# Altium PCB ADC0809电压采集.PcbDoc
Units mm, origin at the board's own origin, x right, y up, seen from the top; angles counter-clockwise.
Board outline 74.8 x 81.66 mm, 2 copper layers (Top Layer, Bottom Layer); 17 components, 35 nets, 125 pads, 0 vias.
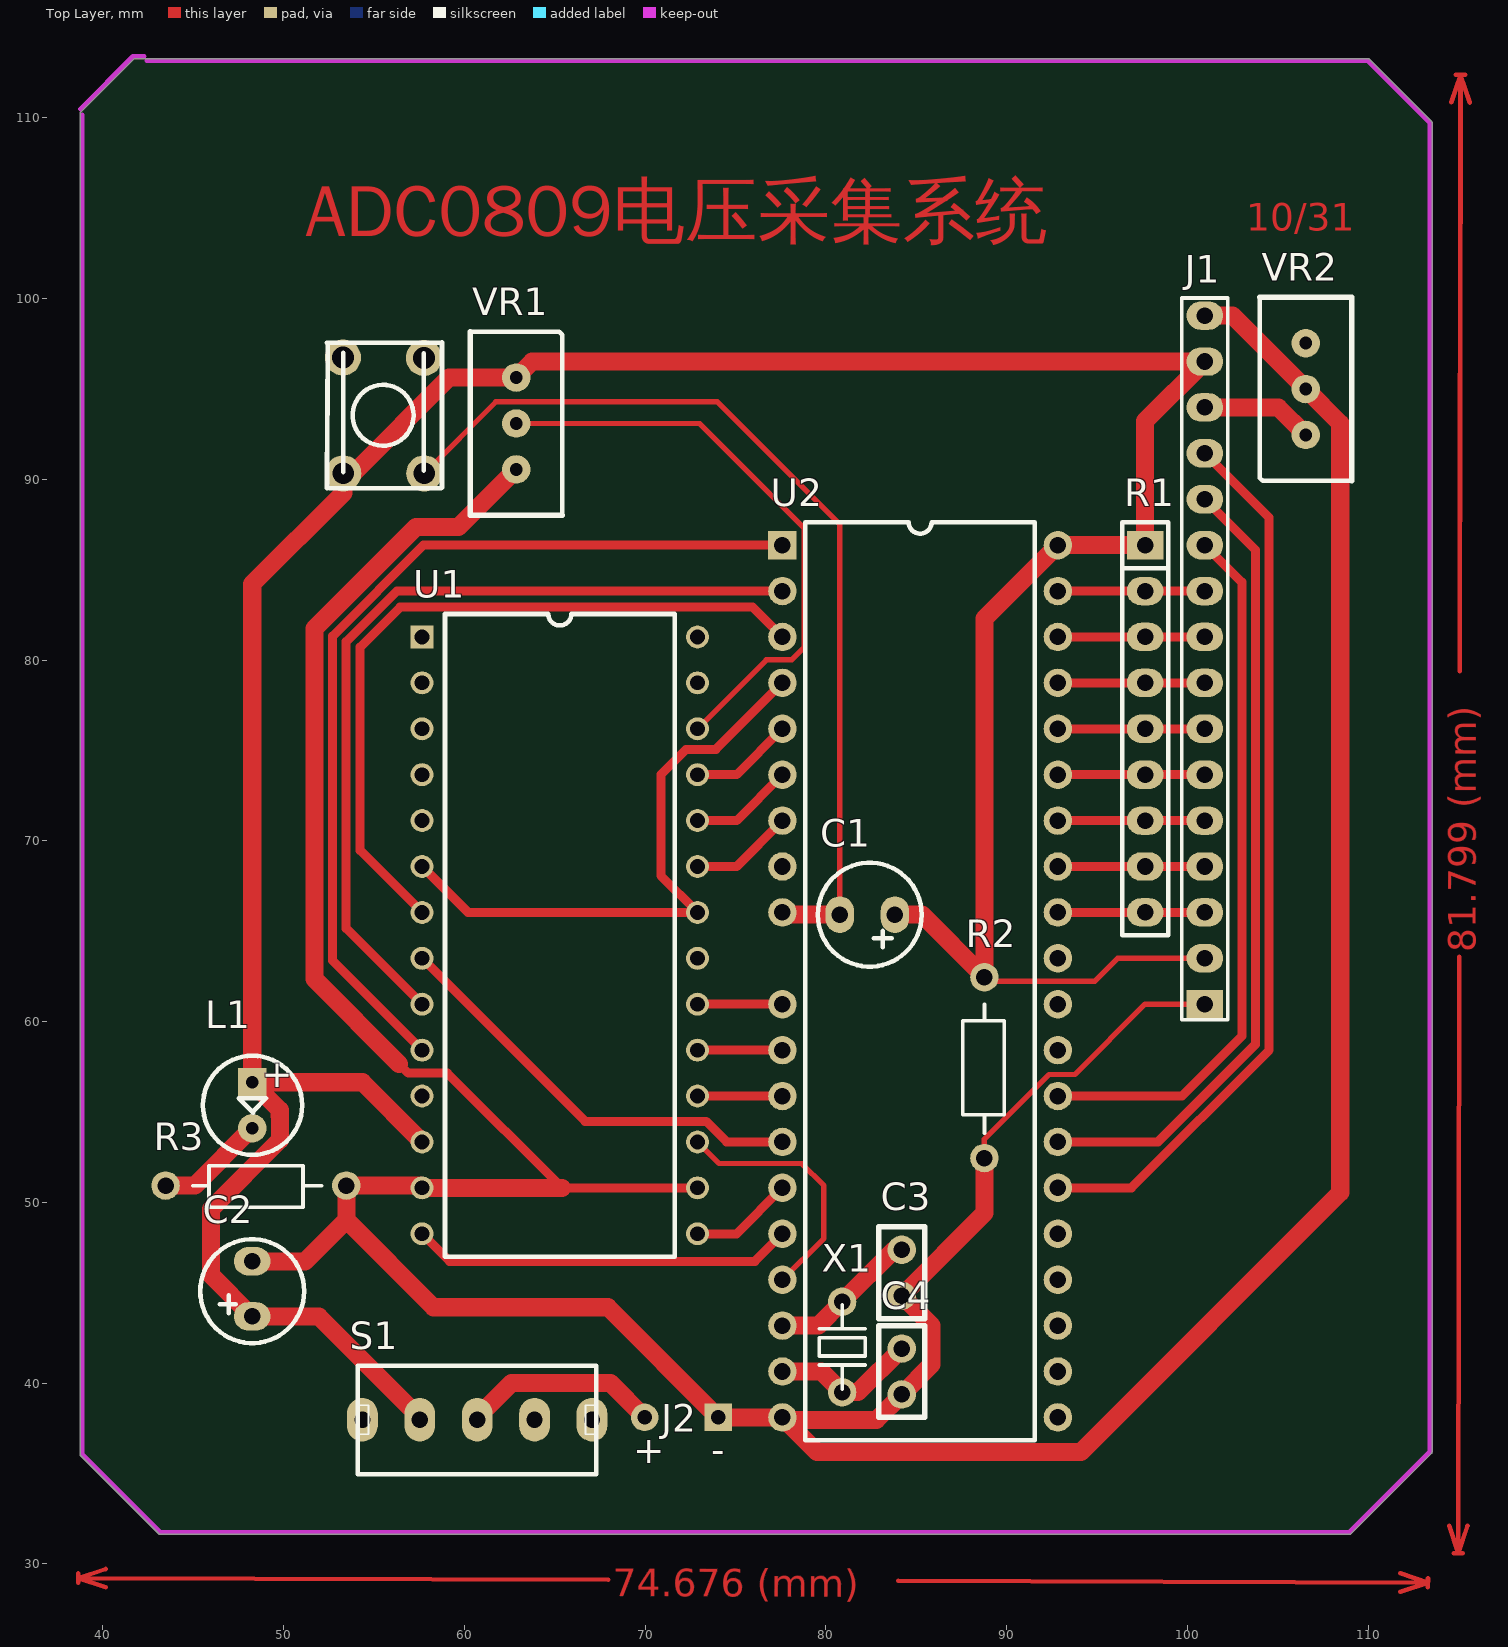
[diagram p0: Top Layer view]
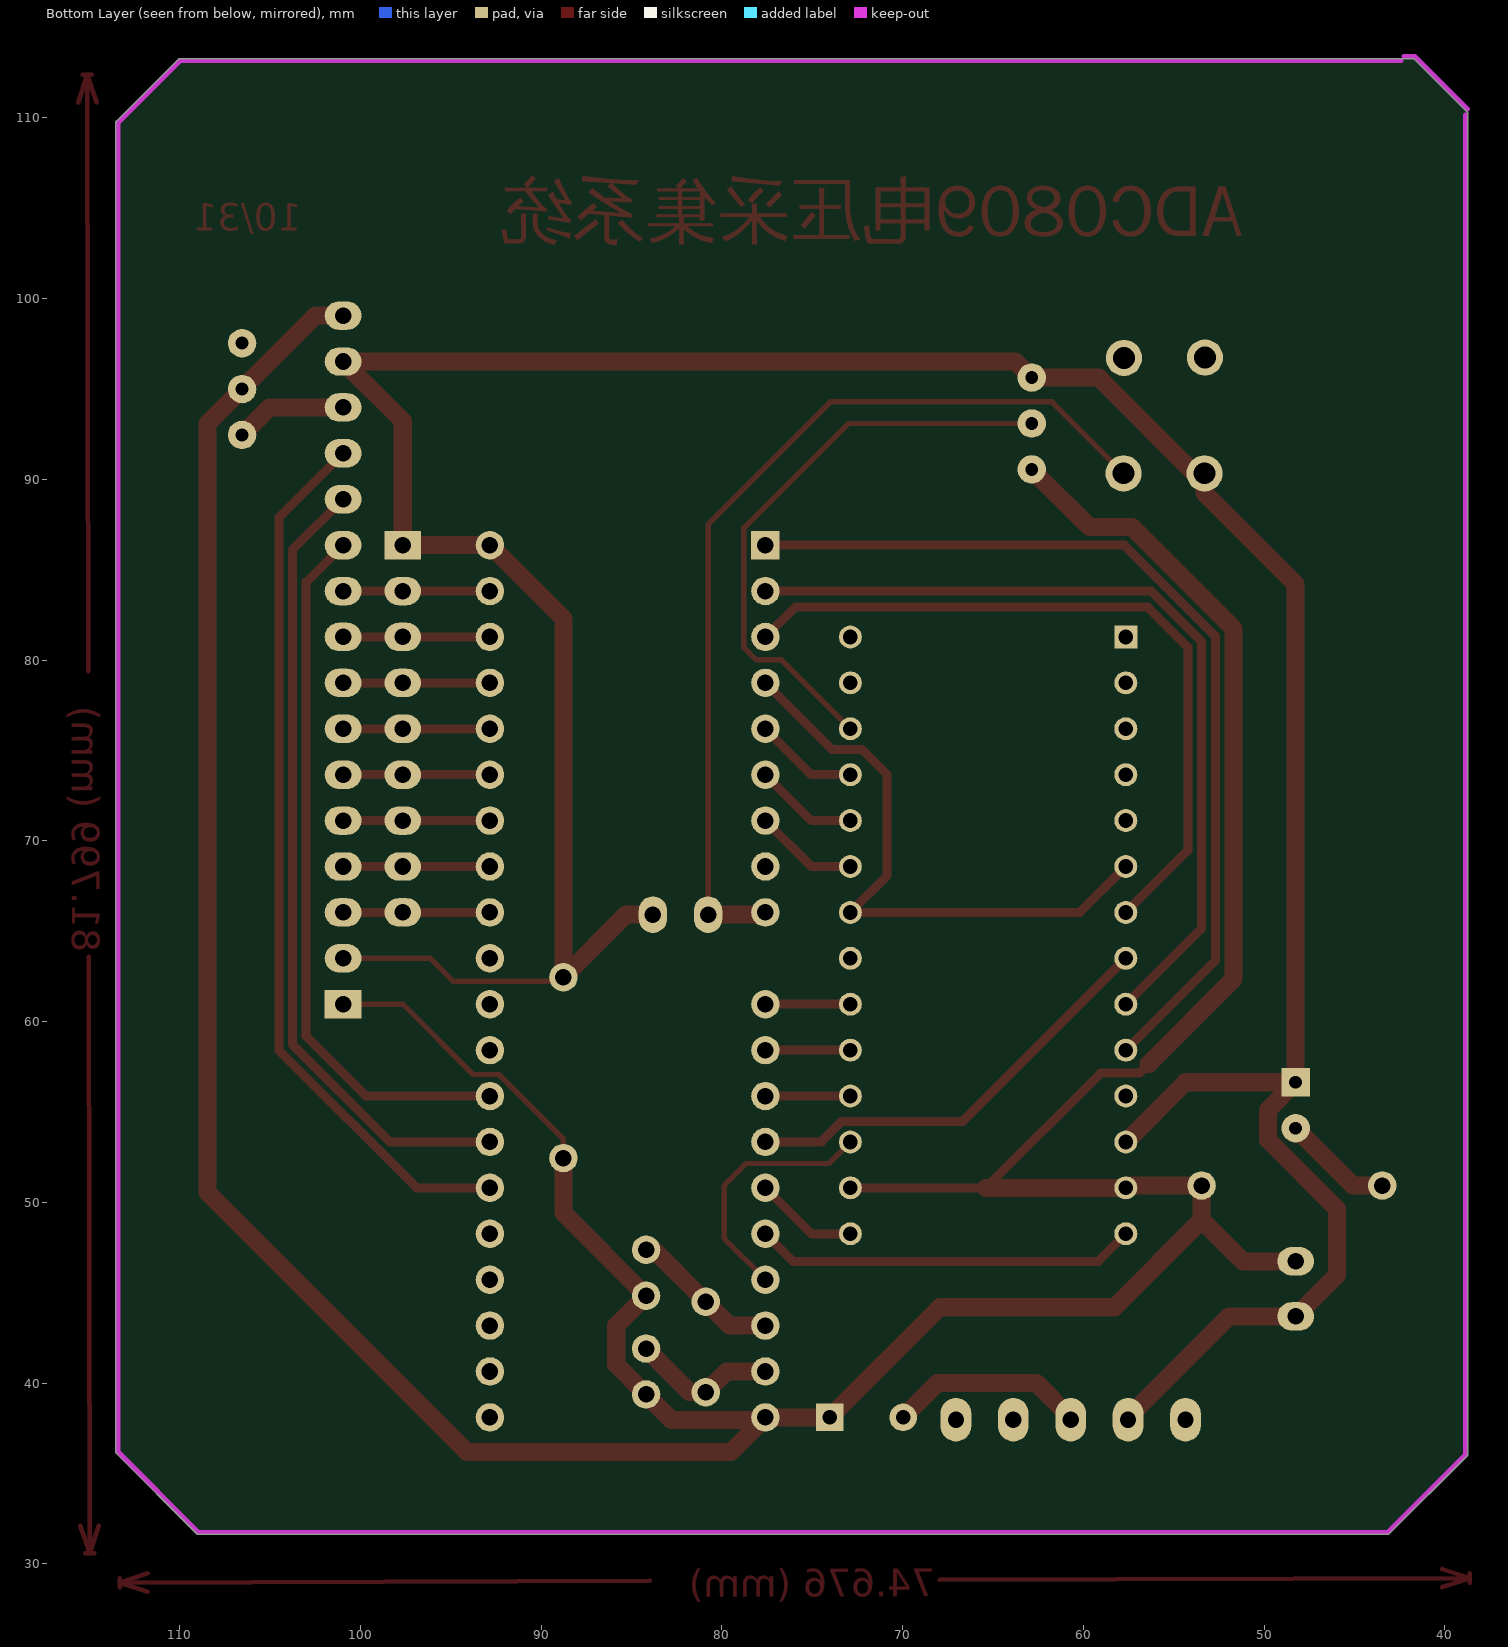
[diagram p1: Bottom Layer view, seen from below]

## Layer stack, top to bottom
Top Solder: solder mask 0.0102, Solder Resist, Dk 3.5
Top Layer: signal copper 0.0356
Dielectric 1: dielectric 0.32, FR-4, Dk 4.8
Bottom Layer: signal copper 0.0356
Bottom Solder: solder mask 0.0102, Solder Resist, Dk 3.5

## Board outline
38.735,36.068 38.735,110.183 cw(c38.862,110.183) 38.737,110.21 cw(c38.862,110.236) 38.772,110.326 41.693,113.247 41.692,113.247 cw(c41.783,113.157) 41.783,113.284 109.982,113.284 cw(c109.982,113.157) 110.073,113.247 110.072,113.247 113.501,109.818 113.501,109.819 cw(c113.411,109.728) 113.538,109.728 113.538,36.195 cw(c113.411,36.195) 113.501,36.104 113.501,36.105 109.056,31.66 109.057,31.66 cw(c108.966,31.75) 108.966,31.623 43.18,31.623 cw(c43.18,31.75) 43.089,31.66 43.09,31.66 38.772,35.978 38.772,35.977 cw(c38.862,36.068)

## Design rules (kind name [scope] priority, off if disabled: settings)
Clearance [All] p1: gap=0.254
PolygonConnect [All] p1: connectstyle=Relief reliefconductorwidth=0.254 reliefentries=4 polygonreliefangle="90 Angle" airgapwidth=0.254
RoutingVias [All] p1: holewidth=0.711 width=1.27 viastyle="Through Hole" minholewidth=0.711 minwidth=1.27 maxholewidth=0.711 maxwidth=1.27
SolderMaskExpansion [All] p1: expansion=0.102
Width [All] p1: maxlimit=2 minlimit=0.254 preferedwidth=1 bottomlayer_maxwidth=0.254 bottomlayer_prefwidth=0.254 minimp=50.000000 maximp=50.000000 favimp=50.000000
30 further rules are at their usual default settings.

## Classes and differential pairs
component class ADC0809电压采集: C1 C2 C3 C4 J1 J2 L1 R1 R2 R3 S1 VR1 VR2 X1

## Components (designator, comment, footprint, x,y, rotation, side; value= is the part's Value field where it differs from the comment)
C1 "10uf" ELEC2 83.82,65.913 r180 top
C2 "100uf" ELEC2 48.26,43.688 r90 top
C3 "30pf" RAD0.1 84.201,47.371 r270 top
C4 "30pf" RAD0.1 84.201,39.37 r90 top
J1 "CON16" SIP16 100.965,60.96 r90 top
J2 "CON2" SIP2 57.912,24.384 r180 top
L1 "B_LED" LED 48.26,56.642 r270 top
R1 "4.7k" SIP9 97.663,86.36 r270 top
R2 "10K" RES 88.773,52.451 r90 top
R3 "1K" RES 53.467,50.927 r180 top
S1 "单刀开关" SW 60.706,37.973 r180 top
U1 "ADC0809" DIP28 57.658,81.28 r0 top
U2 "89C52" DIP40 77.597,86.36 r0 top
VR1 "10K" VR 62.865,90.551 r90 top
VR2 "10K" VR 106.553,97.536 r270 top
X1 "12M" XTAL 80.899,39.497 r90 top
? "SW2" SW2 56.261,93.599 r90 top

## Footprints (in the part's own frame and the unit in brackets; to place one, negate y for a bottom-side part, rotate by r counter-clockwise, add the part's x,y. Pads: shape width x height; smd on the part's side, far side on the other; paste and mask are expansions set on the pad)
DIP28 [mil]
  rect 50x50 hole 32: 1(0,0)
  round 50 hole 32: 2(0,-100) 3(0,-200) 4(0,-300) 5(0,-400) 6(0,-500) 7(0,-600) 8(0,-700) 9(0,-800) 10(0,-900) 11(0,-1000) 12(0,-1100) 13(0,-1200) 14(0,-1300) 15(600,-1300) 16(600,-1200) 17(600,-1100) 18(600,-1000) 19(600,-900) 20(600,-800) 21(600,-700) 22(600,-600) 23(600,-500) 24(600,-400) 25(600,-300) 26(600,-200) 27(600,-100) 28(600,0)
  silkscreen extent 50,-1350 550,50
DIP40 [mil]
  rect 62x62 hole 36: 1(0,0)
  round 62 hole 36: 2(0,-100) 3(0,-200) 4(0,-300) 5(0,-400) 6(0,-500) 7(0,-600) 8(0,-700) 9(0,-800) 11(0,-1000) 12(0,-1100) 13(0,-1200) 14(0,-1300) 15(0,-1400) 16(0,-1500) 17(0,-1600) 18(0,-1700) 19(0,-1800) 20(0,-1900) 21(600,-1900) 22(600,-1800) 23(600,-1700) 24(600,-1600) 25(600,-1500) 26(600,-1400) 27(600,-1300) 28(600,-1200) 29(600,-1100) 30(600,-1000) 31(600,-900) 32(600,-800) 33(600,-700) 34(600,-600) 35(600,-500) 36(600,-400) 37(600,-300) 38(600,-200) 39(600,-100) 40(600,0)
  silkscreen extent 50,-1950 550,50
ELEC2 [mil]
  oval 62x80 hole 36: 1(0,0) 2(120,0)
  silkscreen extent -58,-113 168,113
LED [mil]
  rect 62x62 hole 28: A(0,0)
  round 62 hole 28: K(100,0)
  silkscreen extent -58,-107 158,109
RAD0.1 [mil]
  round 62 hole 36: 1(0,0) 2(100,0)
  silkscreen extent -50,-50 150,50
RES [mil]
  round 62 hole 36: 1(0,0) 2(393.7,0)
  silkscreen extent 54,-43 335,47
SIP2 [mil]
  rect 60x60 hole 32: 1(-635,-540)
  round 60 hole 32: 2(-475,-540)
SIP9 [mil]
  rect 62x80 hole 36: 1(0,0)
  oval 62x80 hole 36: 2(100,0) 3(200,0) 4(300,0) 5(400,0) 6(500,0) 7(600,0) 8(700,0) 9(800,0)
  silkscreen extent -50,-50 850,50
SIP16 [mil]
  rect 62x80 hole 36: 1(0,0)
  oval 62x80 hole 36: 2(100,0) 3(200,0) 4(300,0) 5(400,0) 6(500,0) 7(600,0) 8(700,0) 9(800,0) 10(900,0) 11(1000,0) 12(1100,0) 13(1200,0) 14(1300,0) 15(1400,0) 16(1500,0)
  silkscreen extent -34,-50 1538,50
SW [mm]
  oval 1.7x2.4 hole 0.9: 1(0,0) 2(3.175,0) 3(-3.175,0) 4(-6.35,0) 5(6.35,0)
  silkscreen extent -6.6,-2.99 6.6,3.01
SW2 [mm]
  round 2 hole 1.2: 1(-3.27,2.96) 2(3.14,2.98) 3(3.12,-1.5) 4(-3.27,-1.52)
  silkscreen extent -4.09,-2.5 3.98,3.88
VR [mil]
  round 62 hole 28: 1(0,0) 2(200,0) 3(100,0)
  silkscreen extent -100,-100 300,100
XTAL [mil]
  round 62 hole 36: 1(0,0) 2(196.85,0)
  silkscreen extent 6,-50 191,50

## Part data
C1 C2: library part ELECTRO1, "Electrolytic Capacitor"
C3 C4: library part CAP
J1: "SOCKET"
J2: "Connector"
R1: library part RES*8
R2 R3: library part RES
VR1 VR2: library part POT1
X1: library part CRYSTAL

## Nets (pads, with @x,y where several pads share a name; then routed paths per layer and width w, separated by ;. In a path a pad name is that pad's centre, name@x,y a point inside that pad or via, vN(x,y) a via of type N, cw(c..) or ccw(c..) an arc to the next point about the centre after c; other vN are vias at no path point)
GND: C2.2 C3.2 C4.1 J1.1 J1.16 J2.1 R2.1 R3.1 U1.13 U1.16 U2.20 VR1.1 VR2.3 | length 237.8
  Top Layer w0.3: R2.1 88.773,53.501 92.344,57.071 93.774,57.071 97.663,60.96 J1.1
  Top Layer w0.5: 56.388,57.658 56.896,57.15 59.055,57.15 65.405,50.8 U1.16
  Top Layer w1: C2.2@49.022,46.736 51.181,46.736 53.467,49.022 ; 56.388,57.658 51.701,62.345 51.701,81.746 57.319,87.364 59.678,87.364 VR1.1 ; U1.13@57.531,50.927 R3.1 53.467,49.022 ; U1.13 65.405,50.8 ; R2.1 88.773,49.403 C3.2 85.852,43.18 85.852,41.021 C4.1 82.787,37.956 U2.20@77.741,37.956 ; J1.16 102.489,99.06 VR2.3 108.458,93.091 108.458,50.546 94.107,36.195 79.502,36.195 U2.20@77.741,37.956 ; 53.467,49.022 58.293,44.196 67.945,44.196 J2.1 U2.20 U2.20@77.741,37.956
Net_4: ?.4 C1.2 U2.9 | length 52.3
  Top Layer w0.3: ?.4 61.734,94.282 73.993,94.282 80.772,87.503 C1.2
  Top Layer w1: U2.9 77.724,65.913 C1.2
NetC3_1: C3.1 U2.18 X1.2 | length 8.3
  Top Layer w1: U2.18 79.582,43.18 X1.2 83.773,47.371 C3.1
NetC4_2: C4.2 U2.19 X1.1 | length 8.1
  Top Layer w1: U2.19 79.756,40.64 X1.1 81.788,39.497 C4.2
NetJ1_3: J1.3 R1.9 U2.32 | length 8.1
  Top Layer w0.5: U2.32 R1.9 J1.3
NetJ1_4: J1.4 R1.8 U2.33 | length 8.1
  Top Layer w0.5: U2.33 R1.8 J1.4
NetJ1_5: J1.5 R1.7 U2.34 | length 8.1
  Top Layer w0.5: U2.34 R1.7 J1.5
NetJ1_6: J1.6 R1.6 U2.35 | length 8.1
  Top Layer w0.5: U2.35 R1.6 J1.6
NetJ1_7: J1.7 R1.5 U2.36 | length 8.8
  Top Layer w0.5: U2.36 R1.5 J1.7 J1.7@101.6,76.2
NetJ1_8: J1.8 R1.4 U2.37 | length 8.1
  Top Layer w0.5: U2.37 R1.4 J1.8
NetJ1_9: J1.9 R1.3 U2.38 | length 8.1
  Top Layer w0.5: U2.38 R1.3 J1.9
NetJ1_10: J1.10 R1.2 U2.39 | length 8.1
  Top Layer w0.5: U2.39 R1.2 J1.10
NetJ1_11: J1.11 U2.28 | length 39.6
  Top Layer w0.5: U2.28 99.695,55.88 103.013,59.198 103.013,84.312 J1.11
NetJ1_12: J1.12 U2.27 | length 44.5
  Top Layer w0.5: U2.27 98.375,53.34 103.767,58.732 103.767,86.098 J1.12
NetJ1_13: J1.13 U2.26 | length 49.3
  Top Layer w0.5: U2.26 96.901,50.8 104.521,58.42 104.521,87.884 J1.13
NetJ2_2: J2.2 S1.1 | length 11
  Top Layer w1: S1.1 60.706,38.1 62.611,40.005 68.072,40.005 J2.2
NetL1_K: L1.K R3.2 | length 6.1
  Top Layer w1: R3.2 45.085,50.927 L1.K
NetU1_6: U1.6 U1.22 U2.4 | length 33.6
  Top Layer w0.5: U1.6 60.198,66.04 U1.22 70.866,68.072 70.866,73.66 72.267,75.061 73.918,75.061 U2.4
NetU1_7: U1.7 U2.3 | length 41.1
  Top Layer w0.5: U1.7 54.229,69.469 54.229,80.722 56.438,82.931 75.946,82.931 U2.3
NetU1_9: U1.9 U2.2 | length 47.1
  Top Layer w0.5: U1.9 53.459,65.159 53.459,81.018 56.261,83.82 U2.2
NetU1_10: U1.10 U2.1 | length 51.9
  Top Layer w0.5: U1.10 52.705,63.373 52.705,81.33 57.735,86.36 U2.1
NetU1_23: U1.23 U2.7 | length 5.8
  Top Layer w0.5: U1.23 75.057,68.58 U2.7
NetU1_24: U1.24 U2.6 | length 5.8
  Top Layer w0.5: U1.24 75.057,71.12 U2.6
NetU1_25: U1.25 U2.5 | length 5.8
  Top Layer w0.5: U1.25 75.057,73.66 U2.5
NetU1_26: U1.26 VR1.3 | length 32.7
  Top Layer w0.3: VR1.3 73.012,93.091 78.788,87.315 78.788,80.693 78.105,80.01 76.708,80.01 U1.26
P3.0: U1.21
P3.1: U1.20 U2.11 | length 4.7
  Top Layer w0.5: U1.20 U2.11
P3.2: U1.19 U2.12 | length 4.7
  Top Layer w0.5: U1.19 U2.12
P3.3: U1.18 U2.13 | length 4.7
  Top Layer w0.5: U1.18 U2.13
P3.4: U1.8 U2.14 | length 24.1
  Top Layer w0.5: U1.8 66.679,54.479 73.37,54.479 74.509,53.34 U2.14
P3.5: U1.15 U2.15 | length 5.8
  Top Layer w0.5: U1.15 75.057,48.26 U2.15
P3.6: U1.14 U2.16 | length 21.2
  Top Layer w0.5: U1.14 59.182,46.736 76.073,46.736 U2.16
P3.7: U1.17 U2.17 | length 14.1
  Top Layer w0.3: U1.17 74.089,52.149 78.661,52.149 79.883,50.927 79.883,48.006 U2.17
V0: J1.14 VR2.2 | length 6.2
  Top Layer w1: J1.14 105.029,93.98 VR2.2
VCC: ?.1 C1.1 C2.1 J1.2 J1.15 L1.A R1.1 R2.2 S1.2 U1.12 U2.40 VR1.2 | length 185.7
  Top Layer w0.3: R2.2 88.994,62.23 94.869,62.23 96.139,63.5 J1.2
  Top Layer w1: S1.2 57.531,38.1 51.943,43.688 C2.1 45.974,45.974 45.974,49.636 49.801,53.464 49.801,54.758 49.784,54.775 49.784,55.118 L1.A ; U1.12 54.356,56.642 L1.A ; C1.1 85.311,65.913 R2.2 88.773,82.296 U2.40 R1.1 97.663,93.218 J1.15 63.754,96.52 VR1.2 59.154,95.631 53.852,90.329 ?.1 53.301,89.242 48.26,84.201 L1.A
pads on no net: ?.2 ?.3 S1.3 S1.4 S1.5 U1.1 U1.2 U1.3 U1.4 U1.5 U1.11 U1.27 U1.28 U2.8 U2.21 U2.22 U2.23 U2.24 U2.25 U2.29 U2.30 U2.31 VR2.1
copper on no net: | length 139.5
  Top Layer w0.254: 38.633,28.955 38.635,29.463 ; 40.156,28.696 38.634,29.209 ; 40.16,29.712 38.634,29.209 ; 67.948,29.109 38.634,29.209 ; 83.996,29.054 113.31,28.955 ; 111.784,28.452 113.31,28.955 ; 111.788,29.468 113.31,28.955 ; 113.309,28.701 113.311,29.209 ; 114.481,32.103 114.986,30.579 ; 114.603,110.854 115.113,112.377 ; 114.732,30.579 115.24,30.578 ; 114.859,112.378 115.367,112.377 ; 115.037,63.581 114.986,30.579 ; 115.062,79.375 115.113,112.377 ; 115.497,32.102 114.986,30.579 ; 115.619,110.853 115.113,112.377

## Keep-outs
Keep-Out Layer:
  lines w0.254: 38.735,110.49 41.656,113.411 42.291,113.411 ; 38.862,110.183 38.862,36.068 43.18,31.75 108.966,31.75 113.411,36.195 113.411,109.728 109.982,113.157 42.418,113.157

## Other copper
Top Layer:
  text "10/31" at 103.251,103.759 h1.52
  text "ADC0809电压采集系统" at 51.181,102.489 h5
  text "81.799 (mm)" at 115.952,63.834 h1.52 r89.91
  text "74.676 (mm)" at 68.199,28.194 h1.52 r359.81

## Silkscreen, mask and mechanical layers (free items; w line width, h text height)
Top Overlay:
  text "+" at 69.342,35.56 h1.52
  text "-" at 73.66,35.56 h1.52

## Text inside footprints (layer, text, board x,y; h text height)
L1: Top Overlay "+" at 50.292,56.134 h1.52 r90